# Altium PCB PCB2.PcbDoc
Units mm, origin at the board's own origin, x right, y up, seen from the top; angles counter-clockwise.
Board outline 17.86 x 37.46 mm, 2 copper layers (Top Layer, Bottom Layer); 1 components, 0 nets, 2 pads, 2 vias.
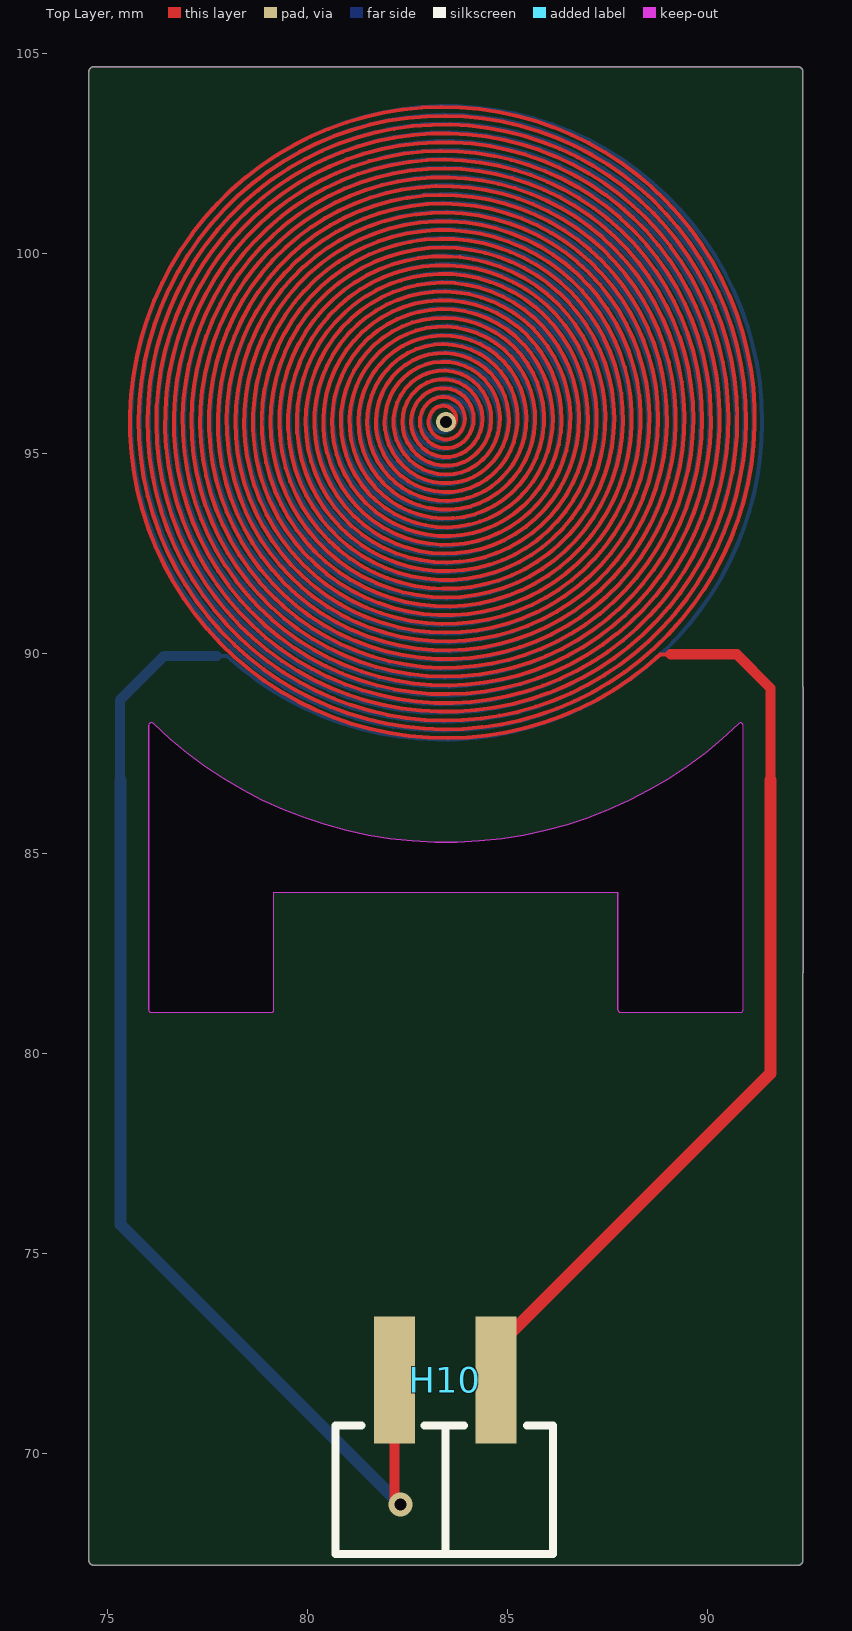
[diagram p0: Top Layer view]
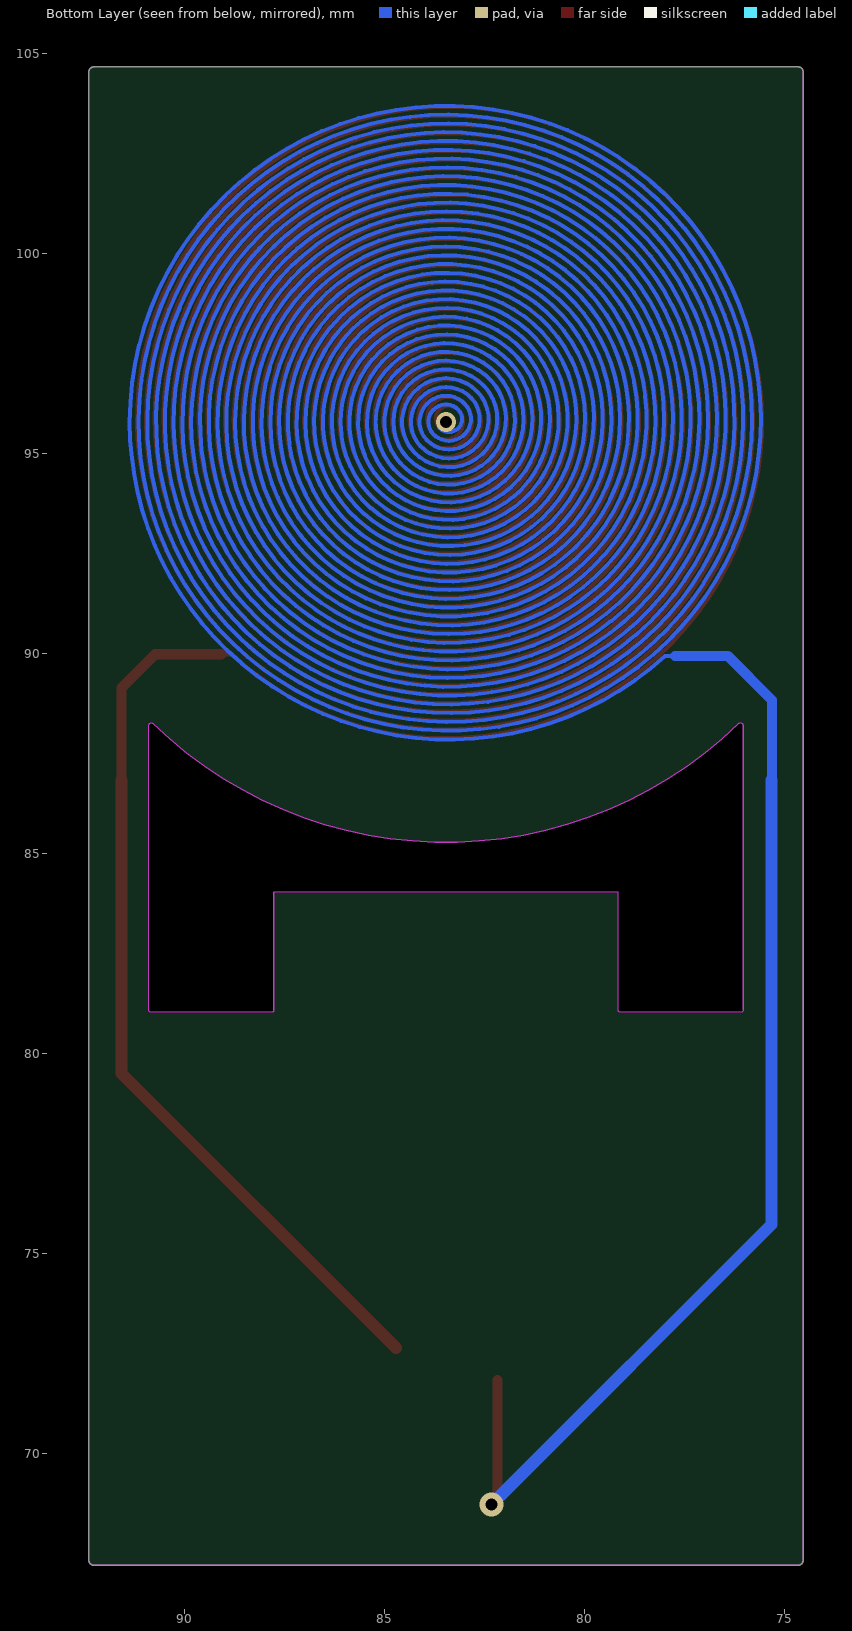
[diagram p1: Bottom Layer view, seen from below]

## Layer stack, top to bottom
Top Solder: solder mask 0.0102, Solder Resist, Dk 3.5
Top Layer: signal copper 0.0356
Dielectric 1: dielectric 0.32, FR-4, Dk 4.8
Bottom Layer: signal copper 0.0356
Bottom Solder: solder mask 0.0102, Solder Resist, Dk 3.5

## Board outline
74.535,67.34 ccw(c74.662,67.34) 74.662,67.213 92.262,67.213 ccw(c92.262,67.34) 92.39,67.34 92.39,82.023 ccw(c92.329,82.042) 92.393,82.042 92.393,89.153 ccw(c92.329,89.153) 92.39,89.173 92.39,104.548 ccw(c92.262,104.548) 92.262,104.676 74.662,104.676 ccw(c74.662,104.548) 74.535,104.548
cut-out: 76.096,81.034 79.096,81.034 ccw(c79.096,81.097) 79.16,81.097 79.16,84.034 87.765,84.034 87.765,81.097 ccw(c87.829,81.097) 87.829,81.034 90.829,81.034 ccw(c90.829,81.097) 90.893,81.097 90.893,88.209 ccw(c90.829,88.209) 90.784,88.254 ccw(c90.784,88.255) 90.785,88.254 90.784,88.254 cw(c83.467,95.796) 76.145,88.259 ccw(c76.1,88.213) 76.052,88.255 ccw(c76.096,88.209) 76.032,88.209 76.032,81.097 ccw(c76.096,81.097)

## Design rules (kind name [scope] priority, off if disabled: settings)
Clearance [All] p1: gap=0.254 ignorepadtopadclearanceinfootprint=FALSE except(0: Arc-Hole Track-Hole SMDPad-Hole THPad-Hole Via-Hole Fill-Hole Poly-Hole Region-Hole Text-Hole)
PolygonConnect [All] p1: connectstyle=Relief reliefconductorwidth=0.254 reliefentries=4 polygonreliefangle="90 Angle" airgapwidth=0.254
RoutingVias [All] p1: holewidth=0.711 width=1.27 viastyle="Through Hole" minholewidth=0.711 minwidth=1.27 maxholewidth=0.711 maxwidth=1.27
SolderMaskExpansion [All] p1: expansion=0.102 istentingtop=FALSE
Width [All] p1: maxlimit=0.254 minlimit=0.254 preferedwidth=0.254
30 further rules are at their usual default settings.

## Components (designator, comment, footprint, x,y, rotation, side; value= is the part's Value field where it differs from the comment)
H10 "H2P2.54" M20-8890245R 84.063,74.153 r180 top (schematic designator H1)

## Footprints (in the part's own frame and the unit in brackets; to place one, negate y for a bottom-side part, rotate by r counter-clockwise, add the part's x,y. Pads: shape width x height; smd on the part's side, far side on the other; paste and mask are expansions set on the pad)
M20-8890245R [mm]
  rect 1.02x3.17 smd: 1(-0.653,2.307) 2(1.887,2.307)
  silkscreen extent -2.08,3.44 3.35,6.65, body extent -1.92,0.84 3.16,12.34, height 2.5

## Via types
v1: diameter 0.5, hole 0.3, Top Layer to Bottom Layer, tented both sides, 1 vias
v2: diameter 0.6, hole 0.3, Top Layer to Bottom Layer, tented both sides, 1 vias

## Nets (pads, with @x,y where several pads share a name; then routed paths per layer and width w, separated by ;. In a path a pad name is that pad's centre, name@x,y a point inside that pad or via, vN(x,y) a via of type N, cw(c..) or ccw(c..) an arc to the next point about the centre after c; other vN are vias at no path point)
pads on no net: H10.1 H10.2
copper on no net: | length 1900.6
  Top Layer w0.1: v1(83.467,95.796) 83.62,95.643 ccw(c83.392,95.876) 83.159,96.104 ccw(c83.467,95.796) 83.762,95.476 ccw(c83.392,95.876) 83.022,96.277 ccw(c83.467,95.796) 83.911,95.314 ccw(c83.392,95.876) 82.873,96.439 ccw(c83.467,95.796) 84.06,95.153 ccw(c83.392,95.876) 82.724,96.6 ccw(c83.467,95.796) 84.209,94.991 ccw(c83.392,95.876) 82.575,96.762 ccw(c83.467,95.796) 84.358,94.83 ccw(c83.392,95.876) 82.426,96.923 ccw(c83.467,95.796) 84.507,94.669 ccw(c83.392,95.876) 82.277,97.084 ccw(c83.467,95.796) 84.656,94.507 ccw(c83.392,95.876) 82.128,97.246 ccw(c83.467,95.796) 84.805,94.346 ccw(c83.392,95.876) 81.979,97.407 ccw(c83.467,95.796) 84.954,94.184 ccw(c83.392,95.876) 81.83,97.568 ccw(c83.467,95.796) 85.103,94.023 ccw(c83.392,95.876) 81.681,97.73 ccw(c83.467,95.796) 85.252,93.862 ccw(c83.392,95.876) 81.532,97.891 ccw(c83.467,95.796) 85.401,93.7 ccw(c83.392,95.876) 81.383,98.053 ccw(c83.467,95.796) 85.55,93.539 ccw(c83.392,95.876) 81.234,98.214 ccw(c83.467,95.796) 85.699,93.378 ccw(c83.392,95.876) 81.086,98.375 ccw(c83.467,95.796) 85.848,93.216 ccw(c83.392,95.876) 80.937,98.537 ccw(c83.467,95.796) 85.997,93.055 ccw(c83.392,95.876) 80.788,98.698 ccw(c83.467,95.796) 86.146,92.893 ccw(c83.392,95.876) 80.639,98.859 ccw(c83.467,95.796) 86.295,92.732 ccw(c83.392,95.876) 80.49,99.021 ccw(c83.467,95.796) 86.444,92.571 ccw(c83.392,95.876) 80.341,99.182 ccw(c83.467,95.796) 86.593,92.409 ccw(c83.392,95.876) 80.192,99.344 ccw(c83.467,95.796) 86.742,92.248 ccw(c83.392,95.876) 80.043,99.505 ccw(c83.467,95.796) 86.891,92.087 ccw(c83.392,95.876) 79.894,99.666 ccw(c83.467,95.796) 87.04,91.925 ccw(c83.392,95.876) 79.745,99.828 ccw(c83.467,95.796) 87.189,91.764 ccw(c83.392,95.876) 79.596,99.989 ccw(c83.467,95.796) 87.338,91.602 ccw(c83.392,95.876) 79.447,100.151 ccw(c83.467,95.796) 87.487,91.441 ccw(c83.392,95.876) 79.298,100.312 ccw(c83.467,95.796) 87.636,91.28 ccw(c83.392,95.876) 79.149,100.473 ccw(c83.467,95.796) 87.785,91.118 ccw(c83.392,95.876) 79,100.635 ccw(c83.467,95.796) 87.934,90.957 ccw(c83.392,95.876) 78.851,100.796 ccw(c83.467,95.796) 88.083,90.795 ccw(c83.392,95.876) 78.702,100.957 ccw(c83.467,95.796) 88.232,90.634 ccw(c83.392,95.876) 78.553,101.119 ccw(c83.467,95.796) 88.381,90.473 ccw(c83.392,95.876) 78.404,101.28 ccw(c83.467,95.796) 88.53,90.311 ccw(c83.392,95.876) 78.255,101.442 ccw(c83.467,95.796) 88.679,90.15 ccw(c83.392,95.876) 78.106,101.603 ccw(c83.467,95.796) 88.828,89.989 89.074,89.989
  Top Layer w0.254: 82.176,71.847 82.176,68.734 v2(82.324,68.734) ; 89.074,89.989 89.274,89.989 90.551,89.989 90.732,89.989 91.579,89.142 91.579,87.684 91.579,86.842
  Top Layer w0.3: 84.709,72.644 91.579,79.514 91.579,86.842
  Bottom Layer w0.1: 77.74,89.949 77.986,89.949 ccw(c83.386,95.87) 89.275,90.434 ; v1(83.467,95.796) 83.62,95.643 cw(c83.386,95.87) 83.159,96.104 cw(c83.467,95.796) 83.787,95.5 cw(c83.386,95.87) 82.985,96.24 cw(c83.467,95.796) 83.948,95.351 cw(c83.386,95.87) 82.824,96.389 cw(c83.467,95.796) 84.11,95.202 cw(c83.386,95.87) 82.662,96.538 cw(c83.467,95.796) 84.271,95.053 cw(c83.386,95.87) 82.501,96.687 cw(c83.467,95.796) 84.433,94.904 cw(c83.386,95.87) 82.34,96.836 cw(c83.467,95.796) 84.594,94.755 cw(c83.386,95.87) 82.178,96.985 cw(c83.467,95.796) 84.755,94.606 cw(c83.386,95.87) 82.017,97.134 cw(c83.467,95.796) 84.917,94.457 cw(c83.386,95.87) 81.856,97.283 cw(c83.467,95.796) 85.078,94.308 cw(c83.386,95.87) 81.694,97.432 cw(c83.467,95.796) 85.24,94.159 cw(c83.386,95.87) 81.533,97.581 cw(c83.467,95.796) 85.401,94.01 cw(c83.386,95.87) 81.371,97.73 cw(c83.467,95.796) 85.562,93.861 cw(c83.386,95.87) 81.21,97.879 cw(c83.467,95.796) 85.724,93.712 cw(c83.386,95.87) 81.049,98.028 cw(c83.467,95.796) 85.885,93.563 cw(c83.386,95.87) 80.887,98.177 cw(c83.467,95.796) 86.046,93.414 cw(c83.386,95.87) 80.726,98.326 cw(c83.467,95.796) 86.208,93.265 cw(c83.386,95.87) 80.565,98.475 cw(c83.467,95.796) 86.369,93.116 cw(c83.386,95.87) 80.403,98.624 cw(c83.467,95.796) 86.531,92.967 cw(c83.386,95.87) 80.242,98.773 cw(c83.467,95.796) 86.692,92.819 cw(c83.386,95.87) 80.08,98.922 cw(c83.467,95.796) 86.853,92.67 cw(c83.386,95.87) 79.919,99.071 cw(c83.467,95.796) 87.015,92.521 cw(c83.386,95.87) 79.758,99.22 cw(c83.467,95.796) 87.176,92.372 cw(c83.386,95.87) 79.596,99.369 cw(c83.467,95.796) 87.337,92.223 cw(c83.386,95.87) 79.435,99.518 cw(c83.467,95.796) 87.499,92.074 cw(c83.386,95.87) 79.273,99.667 cw(c83.467,95.796) 87.66,91.925 cw(c83.386,95.87) 79.112,99.816 cw(c83.467,95.796) 87.822,91.776 cw(c83.386,95.87) 78.951,99.965 cw(c83.467,95.796) 87.983,91.627 cw(c83.386,95.87) 78.789,100.114 cw(c83.467,95.796) 88.144,91.478 cw(c83.386,95.87) 78.628,100.263 cw(c83.467,95.796) 88.306,91.329 cw(c83.386,95.87) 78.467,100.412 cw(c83.467,95.796) 88.467,91.18 cw(c83.386,95.87) 78.305,100.561 cw(c83.467,95.796) 88.629,91.031 cw(c83.386,95.87) 78.144,100.71 cw(c83.467,95.796) 88.79,90.882 cw(c83.386,95.87) 77.982,100.859 cw(c83.467,95.796) 88.951,90.733 cw(c83.386,95.87) 77.821,101.008 cw(c83.467,95.796) 89.113,90.584 ; 89.274,90.435 ccw(c83.467,95.796) 91.37,95.796 ccw(c83.467,95.796) 77.66,101.157 ; 77.66,101.157 ccw(c83.386,95.87) 89.113,90.584 ; 77.66,101.157 ccw(c83.386,95.87) 89.113,90.584
  Bottom Layer w0.254: 75.323,86.842 75.311,86.854 75.311,87.884 75.311,88.839 76.421,89.949 77.74,89.949
  Bottom Layer w0.3: 75.323,86.842 75.323,75.735 v2(82.324,68.734) 81.181,69.877

## Polygon pours and split planes (outlines as drawn)
no net on Bottom Solder "NONET_L-01_P-001" (solid): 76.073,88.011 ccw(c83.294,96.267) 90.784,88.254 92.399,88.011 92.399,93.164 81.226,93.164 77.597,89.535 76.503,89.491 75.714,88.773
no net on Bottom Solder "NONET_L-01_P-001" (solid): 92.39,104.676 74.535,104.676 74.535,92.343 74.662,89.14 76.2,90.678 92.39,90.678
no net on Top Solder "NONET_L-01_P-001" (solid): 75.817,88.397 ccw(c83.629,96.697) 91.186,88.164 91.186,88.921 89.24,89.709 cw(c83.629,95.146) 75.817,95.146
no net on Top Solder "NONET_L-01_P-001" (solid): 92.39,104.676 74.535,104.676 74.535,91.327 74.535,88.773 76.073,88.773 79.428,90.297 91.186,90.297 92.329,89.154 92.39,91.501

## Keep-outs
Keep-Out Layer:
  lines w0.01: 90.784,88.254 cw(c83.467,95.796) 76.145,88.259 ccw(c76.1,88.213) 76.052,88.255 ccw(c76.096,88.209) 76.032,88.209 76.032,81.097 ccw(c76.096,81.097) 76.096,81.034 79.096,81.034 ccw(c79.096,81.097) 79.16,81.097 79.16,84.034 87.765,84.034 87.765,81.097 ccw(c87.829,81.097) 87.829,81.034 90.829,81.034 ccw(c90.829,81.097) 90.893,81.097 90.893,88.209 ccw(c90.829,88.209) 90.784,88.254 ; 90.784,88.254 ccw(c90.784,88.255) 90.785,88.254 90.784,88.254 ; 74.535,67.34 ccw(c74.662,67.34) 74.662,67.213 92.262,67.213 ccw(c92.262,67.34) 92.39,67.34 92.39,82.023 ccw(c92.329,82.042) 92.393,82.042 92.393,89.153 ccw(c92.329,89.153) 92.39,89.173 92.39,104.548 ccw(c92.262,104.548) 92.262,104.676 74.662,104.676 ccw(c74.662,104.548) 74.535,104.548 74.535,67.34

## Silkscreen, mask and mechanical layers (free items; w line width, h text height)
Top Solder:
  region: 74.573,89.027 74.573,81.026 75.819,81.026 75.819,89.027
  region: 76.073,81.061 76.073,88.818 75.704,88.818 75.704,81.061
  region: 92.329,81.153 92.329,90.424 91.96,90.424 91.96,81.153
  region: 90.829,88.921 90.829,81.097 91.198,81.097 91.198,88.921
  pour cut-out: 83.467,104.296 cw(c83.632,95.966) 91.962,95.8 91.962,95.673 cw(c83.617,95.682) 83.608,87.337 cw(c83.608,96.043) 74.903,96.043 74.903,96.054 cw(c83.15,96.054)
  pour cut-out: 73.152,98.679 73.279,98.806 80.391,98.806 80.391,106.426 80.518,106.553 85.979,106.553 85.979,98.679 94.742,98.679 94.742,92.583 73.279,92.583
Bottom Solder:
  region: 76.083,81.034 76.083,88.773 75.714,88.773 75.714,81.034
  region: 74.505,91.059 74.505,81.034 74.952,81.034 74.952,91.059
  region: 90.829,89.198 90.829,81.101 92.322,81.101 92.322,89.198
  region: 92.329,82.042 92.329,89.198 91.96,89.198 91.96,82.042
  pour cut-out: 83.467,104.296 cw(c83.632,95.966) 91.962,95.8 91.962,95.673 cw(c83.617,95.682) 83.608,87.337 cw(c83.608,96.043) 74.903,96.043 74.903,96.054 cw(c83.15,96.054)
  pour cut-out: 73.152,98.679 73.279,98.806 80.391,98.806 80.391,106.426 80.518,106.553 85.979,106.553 85.979,98.679 94.742,98.679 94.742,92.583 73.279,92.583
Mechanical 1:
  lines w0.127: 76.096,88.209 76.096,81.097 79.096,81.097 79.096,84.097 87.829,84.097 87.829,81.097 90.829,81.097 ; 76.1,88.213 ccw(c83.467,95.796) 90.829,88.209 90.829,81.097 ; 90.17,81.097 90.829,81.097 ; 90.829,82.042 90.829,81.097 ; 92.329,82.042 92.329,89.153
  lines w0.254: 74.662,68.702 74.662,85.95 ; 74.662,67.34 92.262,67.34 92.262,84.6 92.262,87.3 92.262,104.548 74.662,104.548 74.662,87.3 74.662,84.6 74.662,67.34
Mechanical 2:
  lines w0.127: 86.512,67.34 92.357,67.34 92.357,81.153 87.884,81.153 87.884,84.143 79.057,84.143 79.057,81.026 74.577,81.026 74.577,67.34 86.995,67.34
  text "Pi Bottom Stiffener" at 47.214,63.373 h1.52
Mechanical 4:
  lines w0.127: 80.419,67.337 80.419,73.5 80.419,73.849 84.836,73.849 ; 80.422,67.34 74.577,67.34 74.577,81.026 79.057,81.026 79.057,84.143 87.884,84.143 87.884,81.153 92.357,81.153 92.357,67.34 86.512,67.34 ; 84.767,73.849 86.515,73.849 86.515,73.5 86.515,67.337
  text "Pi Top Stiffener" at 46.833,62.611 h1.52